# EAGLE board Board Comp 1-10-13 (EAGLE 6.3), part 1 of 2
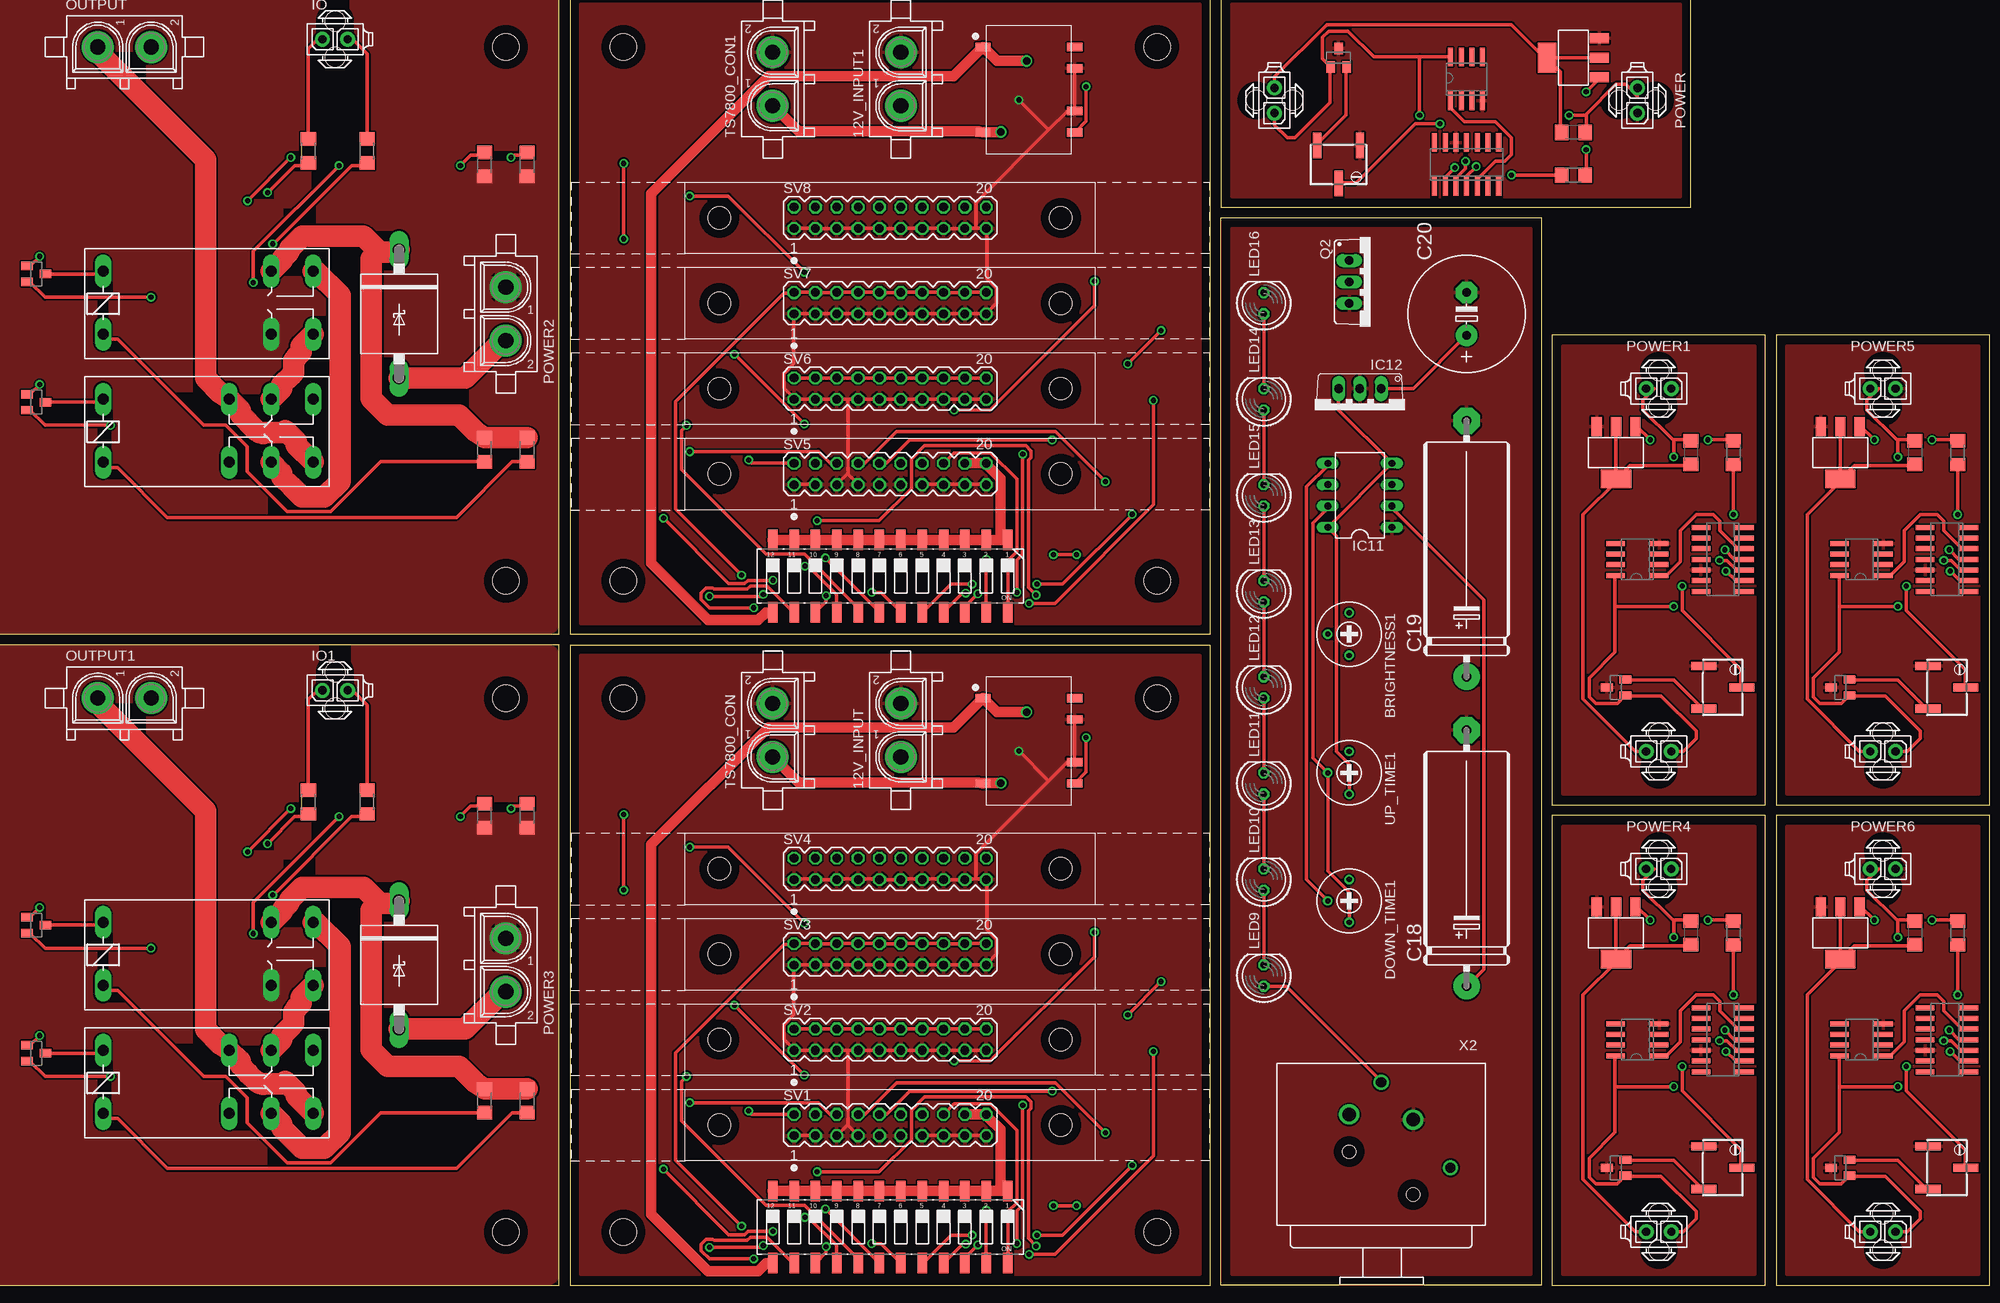
[diagram p0: board, top side]
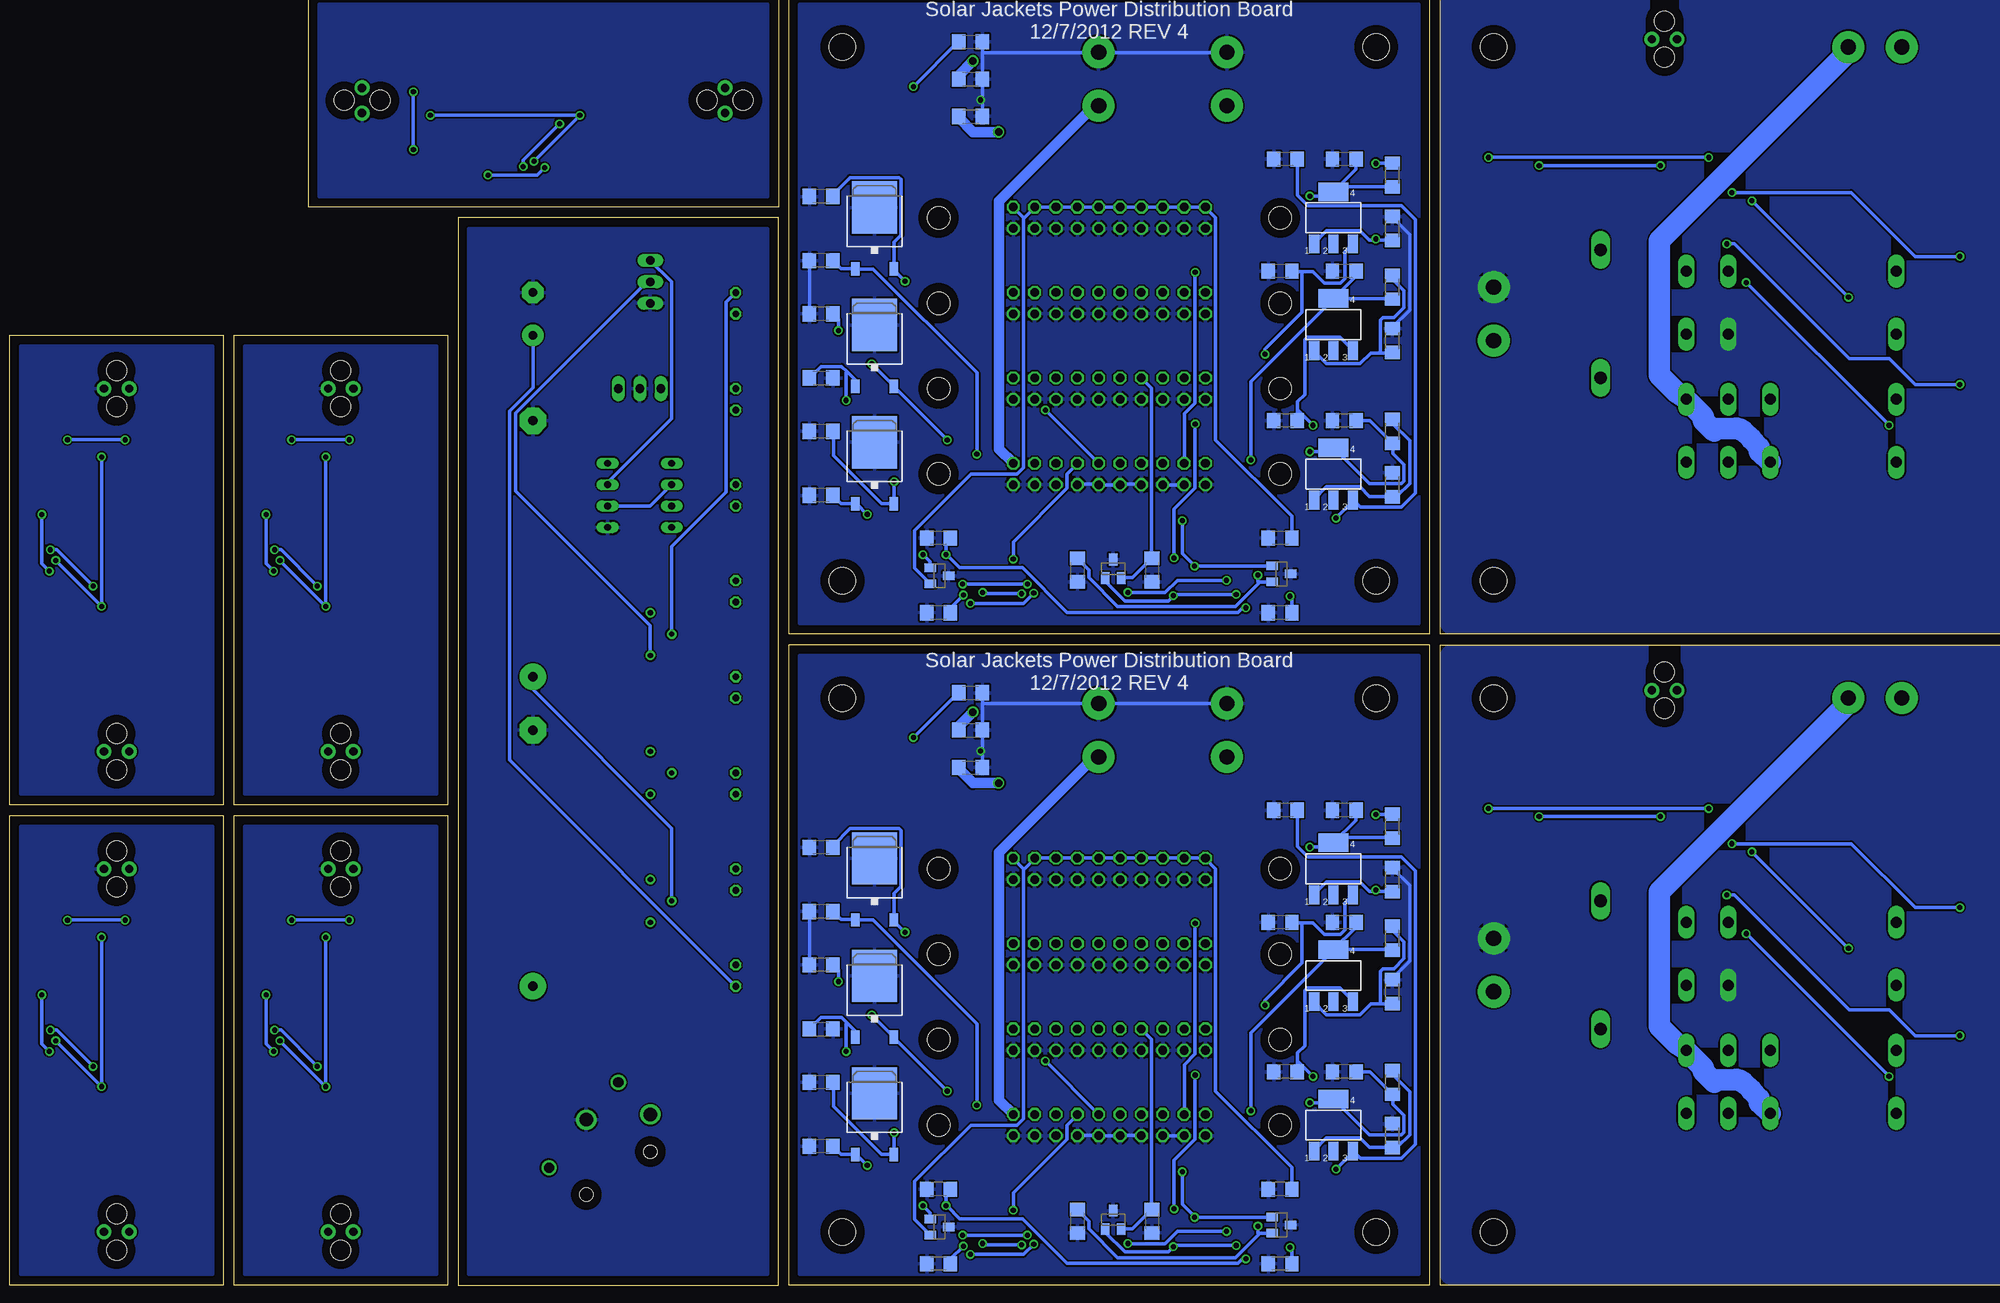
[diagram p1: board, bottom side, seen from below]

No outline drawn. Coordinates in mm, seen from the top.
Copper layers (1*16): Top 0.035mm / dielectric 1.5mm / Bottom 0.035mm
Design rules "default": minimum track width 10mil, minimum drill 24mil, track to track 8mil, track to pad 8mil, pad to pad 8mil, via to via 8mil, smd to smd 8mil, copper to edge 40mil, drill to drill 8mil, minimum pad ring 10mil, minimum via ring 8mil, stop-mask expansion 4mil, vias tented up to drill 0mil, thermal gap 10mil
Net classes: 1 power: width 1.27 mm, drill 0.889 mm
Holes 3.17 mm at 147.32,6.35 83.82,6.35 83.82,69.85 147.32,69.85 147.32,83.82 83.82,83.82 83.82,147.32 147.32,147.32 6.58,84 69.85,147.32 69.85,83.82 6.35,147.32 6.58,6.53 69.85,69.85 69.85,6.35 6.35,69.85
Milling: 40 lines

## Footprints (pad centres in the part's own frame; a part is rotated, then mirrored left to right if it is on the bottom)
SOT23 = smd 1 x 1.4: 1 -0.95,-1.1; 2 0.95,-1.1; 3 0,1.1
350759-4 = drill 1.8 pad 3.81: 1 -3.175,0; 2 3.175,0
C1206 = smd 1.6 x 1.8: 1 -1.4,0; 2 1.4,0
RTRIM3339P = drill 0.61: 1 -2.54,0; 2 0,-2.54; 3 2.54,0
E30-10 = drill 1.118 pad 3.15: + -15.24,0 | drill 1.118 pad 3.15 octagon: - 15.24,0
E5-13 = drill 1.016 pad 2.54: + -2.54,0 | drill 1.016 pad 2.54 octagon: - 2.54,0
P6T15 = drill 1.499 long: A 7.62,0; C -7.62,0
SO14 = smd 0.6 x 2.2: 1 -3.81,-2.6; 2 -2.54,-2.6; 3 -1.27,-2.6; 4 0,-2.6; 5 1.27,-2.6; 6 2.54,-2.6; 7 3.81,-2.6; 8 3.81,2.6; 9 2.54,2.6; 10 1.27,2.6; 11 0,2.6; 12 -1.27,2.6; 13 -2.54,2.6; 14 -3.81,2.6
SOT223 = smd 1.219 x 2.235: 1 -2.311,-3.099; 2 0,-3.099; 3 2.311,-3.099 | smd 3.6 x 2.2: 4 0,3.099
DIL08 = drill 0.813 long: 1 -3.81,-3.81; 2 -1.27,-3.81; 3 1.27,-3.81; 4 3.81,-3.81; 5 3.81,3.81; 6 1.27,3.81; 7 -1.27,3.81; 8 -3.81,3.81
TO220V = drill 1.016 long: 1 -2.54,-2.54; 2 0,-2.54; 3 2.54,-2.54
794681-2 = drill 1 pad 1.778: 1 0,-1.5; 2 0,1.5 | hole 2.4: 2.13,0; -2.17,0
G2R2 = drill 1.321 long: 1 -2.54,-3.683; 2 -2.54,3.81; O1 12.471,3.81; O2 12.471,-3.683; P1 17.45,3.81; P2 17.45,-3.683; S1 22.454,3.81; S2 22.454,-3.683
G2R2A = drill 1.321 long: 1 -2.54,-3.683; 2 -2.54,3.81; P1 17.45,3.81; P2 17.45,-3.683; S1 22.454,3.81; S2 22.454,-3.683
LED5MM = drill 0.813 octagon: A -1.27,0; K 1.27,0
350428-1 = drill 1.8 pad 3.81: 1 -3.175,0; 2 3.175,0
TO252 = smd 1 x 1.6: 1 -2.28,-4.8; 2 2.28,-4.8 | smd 5.4 x 6.2: 3 0,2.5
TO220BV = drill 1.016 long: D 0,-2.54; G -2.54,-2.54; S 2.54,-2.54
RTRIMTS63Y = smd 1 x 3: 1 -2.55,-2.25; 2 0,2.25; 3 2.55,-2.25
R1206 = smd 1.6 x 1.803: 1 -1.422,0; 2 1.422,0
CTS-219-12 = smd 1.13 x 2.44: 1 -13.97,-4.3; 2 -11.43,-4.3; 3 -8.89,-4.3; 4 -6.35,-4.3; 5 -3.81,-4.3; 6 -1.27,-4.3; 7 1.27,-4.3; 8 3.81,-4.3; 9 6.35,-4.3; 10 8.89,-4.3; 11 11.43,-4.3; 12 13.97,-4.3; 13 13.97,4.3; 14 11.43,4.3; 15 8.89,4.3; 16 6.35,4.3; 17 3.81,4.3; 18 1.27,4.3; 19 -1.27,4.3; 20 -3.81,4.3; 21 -6.35,4.3; 22 -8.89,4.3; 23 -11.43,4.3; 24 -13.97,4.3
MA10-2 = drill 1.016 octagon: 1 -11.43,-1.27; 2 -11.43,1.27; 3 -8.89,-1.27; 4 -8.89,1.27; 5 -6.35,-1.27; 6 -6.35,1.27; 7 -3.81,-1.27; 8 -3.81,1.27; 9 -1.27,-1.27; 10 -1.27,1.27; 11 1.27,-1.27; 12 1.27,1.27; 13 3.81,-1.27; 14 3.81,1.27; 15 6.35,-1.27; 16 6.35,1.27; 17 8.89,-1.27; 18 8.89,1.27; 19 11.43,-1.27; 20 11.43,1.27 | hole 2.692: -20.32,0; 20.32,0
SO-08 = smd 0.6 x 2.2: 1 -1.905,-2.6; 2 -0.635,-2.6; 3 0.635,-2.6; 4 1.905,-2.6; 5 1.905,2.6; 6 0.635,2.6; 7 -0.635,2.6; 8 -1.905,2.6
V7805 = smd 0.991 x 1.803: 1 0,0.902; 5 10.16,0.902; 6 10.16,11.798; 7 7.62,11.798; 9 2.54,11.798; 10 0,11.798
NC3FAH2 = drill 1.6: 1 -3.81,0.635; 2 3.81,0 | drill 1.2: 3 0,-3.815; G -8.25,6.355 | hole 1.6: -3.81,9.525; 3.81,4.445

## Placement (x,y rotation side)
3V1  MAX6103  [SOT23]  95.1,84.63 270 bottom
3V2  MAX6103  [SOT23]  115.11,85.24 0 bottom
3V3  MAX6103  [SOT23]  95.1,7.16 270 bottom
3V4  MAX6103  [SOT23]  115.11,7.77 0 bottom
3V5  MAX6103  [SOT23]  135.79,6.93 270 bottom
3V6  MAX6103  [SOT23]  135.79,84.4 270 bottom
12V_INPUT  350759-4  [350759-4]  116.84,66.04 90 top
12V_INPUT1  350759-4  [350759-4]  116.84,143.51 90 top
317CAP1  .33uF  [C1206]  94.61,133.99 180 bottom
317CAP2  1uF  [C1206]  87.63,102.87 180 bottom
317CAP3  .33uF  [C1206]  94.61,56.52 180 bottom
317CAP4  .33uF  [C1206]  95.25,120.65 180 bottom
317CAP5  1uF  [C1206]  87.63,133.99 180 bottom
317CAP6  .33uF  [C1206]  94.61,102.87 180 bottom
317CAP7  1uF  [C1206]  87.63,120.65 180 bottom
317CAP8  1uF  [C1206]  87.63,25.4 180 bottom
317CAP9  .33uF  [C1206]  95.25,43.18 180 bottom
317CAP10  1uF  [C1206]  87.63,56.52 180 bottom
317CAP11  .33uF  [C1206]  94.61,25.4 180 bottom
317CAP12  1uF  [C1206]  87.63,43.18 180 bottom
6103CAP1  1uF  [C1206]  135.89,80.01 180 bottom
6103CAP2  1uF  [C1206]  119.38,85.09 270 bottom
6103CAP3  1uF  [C1206]  95.25,80.01 180 bottom
6103CAP4  1uF  [C1206]  110.49,85.09 270 bottom
6103CAP5  1uF  [C1206]  135.89,88.9 180 bottom
6103CAP6  1uF  [C1206]  95.25,88.9 180 bottom
6103CAP7  1uF  [C1206]  135.89,2.54 180 bottom
6103CAP8  1uF  [C1206]  119.38,7.62 270 bottom
6103CAP9  1uF  [C1206]  95.25,2.54 180 bottom
6103CAP10  1uF  [C1206]  110.49,7.62 270 bottom
6103CAP11  1uF  [C1206]  135.89,11.43 180 bottom
6103CAP12  1uF  [C1206]  95.25,11.43 180 bottom
BRIGHTNESS1  10 k  [RTRIM3339P]  170.18,77.47 270 top
C1  1 uF  [C1206]  196.85,137.16 180 top
C2  1 uF  [C1206]  210.82,99.06 270 top
C3  1uF  [C1206]  149.86,44.45 180 bottom
C4  1uF  [C1206]  149.86,52.07 180 bottom
C5  1uF  [C1206]  149.86,30.48 0 bottom
C6  1uF  [C1206]  149.86,38.1 180 bottom
C7  1uF  [C1206]  149.86,24.13 180 bottom
C8  1uF  [C1206]  149.86,16.51 180 bottom
C9  1uF  [C1206]  149.86,121.92 180 bottom
C10  1uF  [C1206]  149.86,129.54 180 bottom
C11  1uF  [C1206]  149.86,107.95 0 bottom
C12  1uF  [C1206]  149.86,115.57 180 bottom
C13  1uF  [C1206]  149.86,101.6 180 bottom
C14  1uF  [C1206]  149.86,93.98 180 bottom
C15  1 uF  [C1206]  237.49,99.06 270 top
C16  1 uF  [C1206]  237.49,41.91 270 top
C18  1uF  [E30-10]  184.15,50.8 90 top
C19  1uF  [E30-10]  184.15,87.63 90 top
C20  1000uF  [E5-13]  184.15,115.57 90 top
C21  1 uF  [C1206]  210.82,41.91 270 top
D1  6A4  [P6T15]  57.15,38.1 270 top
D3  6A4  [P6T15]  57.15,115.57 270 top
DOWN_TIME1  10k  [RTRIM3339P]  170.18,45.72 270 top
IC1  LM339D  [SO14]  184.15,133.35 0 top
IC2  LM339D  [SO14]  214.63,86.36 90 top
IC3  LM317  [SOT223]  88.9,96.52 0 bottom
IC4  LM317  [SOT223]  88.9,19.05 0 bottom
IC5  LM317  [SOT223]  88.9,49.53 0 bottom
IC6  LM317  [SOT223]  88.9,36.83 0 bottom
IC7  LM317  [SOT223]  88.9,127 0 bottom
IC8  LM317  [SOT223]  88.9,114.3 0 bottom
IC9  LM339D  [SO14]  241.3,86.36 90 top
IC10  LM339D  [SO14]  241.3,29.21 90 top
IC11  ICM7555  [DIL08]  171.45,93.98 90 top
IC12  7805TV  [TO220V]  171.45,104.14 180 top
IC13  LM339D  [SO14]  214.63,29.21 90 top
IO  794681-2  [794681-2]  49.53,148.25 270 top
IO1  794681-2  [794681-2]  49.53,70.78 270 top
J1  794681-2  [794681-2]  207.01,63.5 90 top
J2  794681-2  [794681-2]  161.29,140.97 0 top
J3  794681-2  [794681-2]  207.01,6.35 90 top
J4  794681-2  [794681-2]  233.68,63.5 90 top
J5  794681-2  [794681-2]  233.68,6.35 90 top
K1  G2R2  [G2R2]  24.47,101.6 0 top
K2  G2R2A  [G2R2A]  24.47,116.84 0 top
K3  G2R2  [G2R2]  24.47,24.13 0 top
K4  G2R2A  [G2R2A]  24.47,39.37 0 top
LED9  [LED5MM]  160.02,36.83 90 top
LED10  [LED5MM]  160.02,48.26 90 top
LED11  [LED5MM]  160.02,59.69 90 top
LED12  [LED5MM]  160.02,71.12 90 top
LED13  [LED5MM]  160.02,82.55 90 top
LED14  [LED5MM]  160.02,105.41 90 top
LED15  [LED5MM]  160.02,93.98 90 top
LED16  [LED5MM]  160.02,116.84 90 top
OUTPUT  350428-1  [350428-1]  24.47,147.32 0 top
OUTPUT1  350428-1  [350428-1]  24.47,69.85 0 top
POWER  794681-2  [794681-2]  204.47,140.97 0 top
POWER1  794681-2  [794681-2]  207.01,106.68 90 top
POWER2  350428-1  [350428-1]  69.85,115.57 270 top
POWER3  350428-1  [350428-1]  69.85,38.1 270 top
POWER4  794681-2  [794681-2]  207.01,49.53 90 top
POWER5  794681-2  [794681-2]  233.68,106.68 90 top
POWER6  794681-2  [794681-2]  233.68,49.53 90 top
PWR_1  7805DT  [TO252]  143.51,48.26 0 bottom
PWR_2  7805DT  [TO252]  143.51,34.29 0 bottom
PWR_3  7805DT  [TO252]  143.51,20.32 0 bottom
PWR_4  7805DT  [TO252]  143.51,125.73 0 bottom
PWR_5  7805DT  [TO252]  143.51,111.76 0 bottom
PWR_6  7805DT  [TO252]  143.51,97.79 0 bottom
Q2  IRF512  [TO220BV]  172.72,119.38 270 top
R1  10k  [RTRIMTS63Y]  168.91,133.35 180 top
R2  10k  [RTRIMTS63Y]  214.63,71.12 270 top
R3  220  [R1206]  81.92,101.6 90 bottom
R4  361  [R1206]  81.92,95.25 90 bottom
R5  220  [R1206]  81.92,132.08 90 bottom
R6  361  [R1206]  81.92,125.73 90 bottom
R7  220  [R1206]  81.92,24.13 90 bottom
R8  361  [R1206]  81.92,17.78 90 bottom
R9  220  [R1206]  81.92,54.61 90 bottom
R10  361  [R1206]  81.92,48.26 90 bottom
R11  220  [R1206]  81.92,41.27 90 bottom
R12  361  [R1206]  81.92,34.92 90 bottom
R13  220  [R1206]  81.92,118.75 90 bottom
R14  361  [R1206]  81.92,112.39 90 bottom
R15  1k  [R1206]  72.39,99.4 90 top
R16  1k  [R1206]  67.31,99.4 90 top
R17  1k  [R1206]  53.34,134.96 90 top
R18  1k  [R1206]  46.35,134.96 90 top
R19  0  [R1206]  67.31,133.35 90 top
R20  0  [R1206]  72.39,133.35 90 top
R21  1k  [R1206]  72.39,21.93 90 top
R22  1k  [R1206]  67.31,21.93 90 top
R23  1k  [R1206]  53.34,57.49 90 top
R24  1k  [R1206]  46.35,57.49 90 top
R25  0  [R1206]  67.31,55.88 90 top
R26  0  [R1206]  72.39,55.88 90 top
R27  10k  [RTRIMTS63Y]  214.63,13.97 270 top
R28  10k  [RTRIMTS63Y]  241.3,71.12 270 top
R29  10k  [RTRIMTS63Y]  241.3,13.97 270 top
S1  219-12  [CTS-219-12]  115.57,6.91 180 top
S2  219-12  [CTS-219-12]  115.57,84.38 180 top
SV1  AMPLATCH-20  [MA10-2]  115.57,19.05 0 top
SV2  AMPLATCH-20  [MA10-2]  115.57,29.21 0 top
SV3  AMPLATCH-20  [MA10-2]  115.57,39.37 0 top
SV4  AMPLATCH-20  [MA10-2]  115.57,49.53 0 top
SV5  AMPLATCH-20  [MA10-2]  115.57,96.52 0 top
SV6  AMPLATCH-20  [MA10-2]  115.57,106.68 0 top
SV7  AMPLATCH-20  [MA10-2]  115.57,116.84 0 top
SV8  AMPLATCH-20  [MA10-2]  115.57,127 0 top
T1  PMV56XN  [SOT23]  13.97,105.07 270 top
T2  PMV56XN  [SOT23]  13.97,120.31 270 top
T3  PMV56XN  [SOT23]  13.97,27.6 270 top
T4  PMV56XN  [SOT23]  13.97,42.84 270 top
TS7800_CON  350759-4  [350759-4]  101.6,66.04 90 top
TS7800_CON1  350759-4  [350759-4]  101.6,143.51 90 top
U$1  100  [R1206]  196.85,132.08 0 top
U$2  MAX6103  [SOT23]  168.91,146.05 0 top
U$3  NDT3055  [SOT223]  196.85,146.05 90 top
U$4  LM35  [SO-08]  184.15,143.51 0 top
U$5  100  [R1206]  215.9,99.06 90 top
U$6  MAX6103  [SOT23]  201.93,71.12 90 top
U$7  NDT3055  [SOT223]  201.93,99.06 180 top
U$8  LM35  [SO-08]  204.47,86.36 90 top
U$9  V7805  [V7805]  125.73,69.85 270 top
U$10  V7805  [V7805]  125.73,147.32 270 top
U$11  100  [R1206]  215.9,41.91 90 top
U$12  MAX6103  [SOT23]  201.93,13.97 90 top
U$13  NDT3055  [SOT223]  201.93,41.91 180 top
U$14  LM35  [SO-08]  204.47,29.21 90 top
U$15  100  [R1206]  242.57,99.06 90 top
U$16  MAX6103  [SOT23]  228.6,71.12 90 top
U$17  NDT3055  [SOT223]  228.6,99.06 180 top
U$18  LM35  [SO-08]  231.14,86.36 90 top
U$19  100  [R1206]  242.57,41.91 90 top
U$20  MAX6103  [SOT23]  228.6,13.97 90 top
U$21  NDT3055  [SOT223]  228.6,41.91 180 top
U$22  LM35  [SO-08]  231.14,29.21 90 top
UP_TIME1  10k  [RTRIM3339P]  170.18,60.96 270 top
V7805_C1  1uF  [C1206]  132.08,147.96 0 bottom
V7805_C2  1uF  [C1206]  132.08,143.51 0 bottom
V7805_C3  1uF  [C1206]  132.08,139.06 0 bottom
V7805_C4  1uF  [C1206]  132.08,70.48 0 bottom
V7805_C5  1uF  [C1206]  132.08,66.04 0 bottom
V7805_C6  1uF  [C1206]  132.08,61.59 0 bottom
X2  NC3FAH2  [NC3FAH2]  173.99,20.32 180 top

## Library data of the parts
3V1-3V6 U$1 U$2 U$4-U$6 U$8 U$11 U$12 U$14-U$16 U$18-U$20 U$22 = SolarJacketsADC
12V_INPUT 12V_INPUT1 J1-J5 POWER POWER1 POWER4-POWER6 = con-amp
317CAP1-317CAP12 6103CAP1-6103CAP12 C1-C16 C18-C21 R3-R14 V7805_C1-V7805_C6 = rcl
BRIGHTNESS1 DOWN_TIME1 R1 R2 R27-R29 UP_TIME1 = resistor
D1 D3 = diode
IC1-IC10 IC12 IC13 PWR_1-PWR_6 = linear
IC11 = maxim; MF: MAXIM; MPN: ICM7555IPA+; OC_FARNELL: 9663762; OC_NEWARK: 68K4387
IO IO1 = con-amp; DIR: DIR; ON: ON
K1 K3 = relay; MF: OMRON COMPONENTS USA; MPN: G2R-2-DC6; OC_FARNELL: unknown; OC_NEWARK: 89C5317
K2 K4 = relay; MPN: G2R-2A-DC24; OC_FARNELL: 6985269; OC_NEWARK: 36M5257
LED9-LED16 = led
OUTPUT OUTPUT1 TS7800_CON TS7800_CON1 = con-amp; NEG: -; POS: +
POWER2 POWER3 = con-amp; NEG: -; POS: +; VOLTAGE: 12V
Q2 = transistor-power
R15-R18 R21-R24 = SolarJacketsADC; PART_NUM: CR1206-FX-1001GLF
R19 R20 R25 R26 = SolarJacketsADC; PART_NUM: CR1206-J/-000ELF
S1 S2 = switch-dil; OC_FARNELL: unknown; OC_NEWARK: unknown
SV1-SV8 = SolarJacketsADC; PART_NUM: 5499160-1
T1-T4 = SolarJacketsADC; PART_NUM: PMV56XN,215
U$3 U$7 U$13 U$17 U$21 = SolarJacketsADC; PART_NUM: NDT3055
U$9 U$10 = V7805
X2 = con-neutrik_ag; MPN: NC3FAH2; OC_FARNELL: unknown; OC_NEWARK: 27B4208

## Nets
3.3V1: 317CAP8.1 IC4.4 R7.1 SV1.6
3.3V1_EN: 317CAP3.1 IC4.3 S1.19
3.3V1_EN1: 317CAP1.1 IC3.3 S2.19
3.3V2: 317CAP10.1 IC5.4 R9.1 SV1.4
3.3V2_EN: 317CAP9.1 IC5.3 S1.18
3.3V2_EN1: 317CAP4.1 IC7.3 S2.18
3.3V3: 317CAP12.1 IC6.4 R11.1 SV1.2
3.3V3_EN: 317CAP11.1 IC6.3 S1.17
3.3V3_EN1: 317CAP6.1 IC8.3 S2.17
3.3V4: 317CAP7.1 IC8.4 R13.1 SV5.2
3.3V5: 317CAP2.1 IC3.4 R3.1 SV5.6
3.3V6: 317CAP5.1 IC7.4 R5.1 SV5.4
5V1: C4.1 PWR_1.2 SV1.12
5V1_EN: C3.1 PWR_1.1 S1.22
5V1_EN1: C9.1 PWR_4.1 S2.22
5V2: C6.1 PWR_2.2 SV1.10
5V2_EN: C5.1 PWR_2.1 S1.21
5V2_EN1: C11.1 PWR_5.1 S2.21
5V3: C7.1 PWR_3.2 SV1.8
5V3_EN: C8.1 PWR_3.1 S1.20
5V3_EN1: C14.1 PWR_6.1 S2.20
5V4: C13.1 PWR_6.2 SV5.8
5V5: C12.1 PWR_5.2 SV5.10
5V6: C10.1 PWR_4.2 SV5.12
5V7: IC11.4 IC11.8 IC12.3 UP_TIME1.3
12V: C1.1 IC1.3 J2.1 POWER.2 U$2.1 U$4.8
12V1: C2.1 IC2.3 J1.1 POWER1.2 U$6.1 U$8.8
12V1_EN: S1.24 SV1.16
12V1_EN1: S2.24 SV5.16
12V2 [power]: 12V_INPUT.1 S1.1 S1.2 S1.3 S1.4 S1.5 S1.6 S1.7 S1.8 S1.9 S1.10 S1.11 S1.12 SV1.18 SV1.20
12V2_EN: S1.23 SV1.14
12V2_EN1: S2.23 SV5.14
12V3 [power]: 12V_INPUT1.1 S2.1 S2.2 S2.3 S2.4 S2.5 S2.6 S2.7 S2.8 S2.9 S2.10 S2.11 S2.12 SV5.18 SV5.20
12V4 [power]: D3.C K2.P1 R15.2 R16.2
12V5 [power]: D1.C K4.P1 R21.2 R22.2
12V6: C21.1 IC13.3 J3.1 POWER4.2 U$12.1 U$14.8
12V7: C15.1 IC9.3 J4.1 POWER5.2 U$16.1 U$18.8
12V8: C16.1 IC10.3 J5.1 POWER6.2 U$20.1 U$22.8
12V_PRE [power]: D3.A POWER2.2
12V_PRE1 [power]: D1.A POWER3.2
24V1: C20.+ IC12.1 LED9.A X2.3
DIR: IO.2 R17.2
DIR1: IO1.2 R23.2
GND: IC1.12 POWER.1 R1.1 U$2.3 U$3.3 U$4.4
GND1: IC2.12 POWER1.1 R2.1 U$6.3 U$7.3 U$8.4
GND2: 3V3.3 3V4.3 3V5.3 12V_INPUT.2 317CAP3.2 317CAP8.2 317CAP9.2 317CAP10.2 317CAP11.2 317CAP12.2 6103CAP7.2 6103CAP8.2 6103CAP9.2 6103CAP10.2 6103CAP11.2 6103CAP12.2 C3.2 C4.2 C5.2 C6.2 C7.2 C8.2 PWR_1.3 PWR_2.3 PWR_3.3 R8.2 R10.2 R12.2 SV1.1 SV1.3 SV1.5 SV1.7 SV1.9 SV1.11 SV1.13 SV1.15 SV1.17 SV1.19 SV2.1 SV2.3 SV2.5 SV2.7 SV2.9 SV2.11 SV2.13 SV2.15 SV2.17 SV2.19 SV3.1 SV3.3 SV3.5 SV3.7 SV3.9 SV3.11 SV3.13 SV3.15 SV3.17 SV3.19 SV4.1 SV4.3 SV4.5 SV4.7 SV4.9 SV4.11 SV4.13 SV4.15 SV4.17 SV4.19 TS7800_CON.2 U$9.7 U$9.9 V7805_C4.2 V7805_C5.2 V7805_C6.2
GND3: 3V1.3 3V2.3 3V6.3 12V_INPUT1.2 317CAP1.2 317CAP2.2 317CAP4.2 317CAP5.2 317CAP6.2 317CAP7.2 6103CAP1.2 6103CAP2.2 6103CAP3.2 6103CAP4.2 6103CAP5.2 6103CAP6.2 C9.2 C10.2 C11.2 C12.2 C13.2 C14.2 PWR_4.3 PWR_5.3 PWR_6.3 R4.2 R6.2 R14.2 SV5.1 SV5.3 SV5.5 SV5.7 SV5.9 SV5.11 SV5.13 SV5.15 SV5.17 SV5.19 SV6.1 SV6.3 SV6.5 SV6.7 SV6.9 SV6.11 SV6.13 SV6.15 SV6.17 SV6.19 SV7.1 SV7.3 SV7.5 SV7.7 SV7.9 SV7.11 SV7.13 SV7.15 SV7.17 SV7.19 SV8.1 SV8.3 SV8.5 SV8.7 SV8.9 SV8.11 SV8.13 SV8.15 SV8.17 SV8.19 TS7800_CON1.2 U$10.7 U$10.9 V7805_C1.2 V7805_C2.2 V7805_C3.2
GND4: IC9.12 POWER5.1 R28.1 U$16.3 U$17.3 U$18.4
GND5: C18.- C19.- C20.- IC11.1 IC12.2 Q2.S X2.1
GND6 [power]: K2.P2 POWER2.1 R19.1 R20.1
GND7 [power]: K4.P2 POWER3.1 R25.1 R26.1
GND8: IC13.12 POWER4.1 R27.1 U$12.3 U$13.3 U$14.4
GND9: IC10.12 POWER6.1 R29.1 U$20.3 U$21.3 U$22.4
MOTOR+ [power]: K1.O2 K1.S1 OUTPUT.2
MOTOR+1 [power]: K3.O2 K3.S1 OUTPUT1.2
MOTOR- [power]: K1.O1 K1.S2 OUTPUT.1
MOTOR-1 [power]: K3.O1 K3.S2 OUTPUT1.1
N$1: IC1.2 U$1.1
N$2: U$1.2 U$3.1
N$3: IC1.4 R1.2
N$4: R1.3 U$2.2
N$5: C1.2 J2.2 U$3.2 U$3.4
N$6: IC2.2 U$5.1
N$7: IC2.4 R2.2
N$8: IC1.5 U$4.1
N$9: R2.3 U$6.2
N$10: U$5.2 U$7.1
N$11: C2.2 J1.2 U$7.2 U$7.4
N$12: IC2.5 U$8.1
N$13: IC4.1 R7.2 R8.1
N$14: IC5.1 R9.2 R10.1
N$15: IC6.1 R11.2 R12.1
N$16: U$9.6 V7805_C4.1
N$17: IC3.1 R3.2 R4.1
N$18: IC7.1 R5.2 R6.1
N$19: IC8.1 R13.2 R14.1
N$20: U$10.6 V7805_C1.1
N$21: IC9.2 U$15.1
N$22: IC9.4 R28.2
N$23: R28.3 U$16.2
N$24: U$15.2 U$17.1
N$25: C15.2 J4.2 U$17.2 U$17.4
N$26: IC9.5 U$18.1
N$27: IC10.2 U$19.1
N$28: IC10.4 R29.2
N$29: R29.3 U$20.2
N$30: U$19.2 U$21.1
N$31: C16.2 J5.2 U$21.2 U$21.4
N$32: IC10.5 U$22.1
N$34: C18.+ IC11.2 IC11.6
N$35: C19.+ DOWN_TIME1.2 IC11.5
N$36: DOWN_TIME1.3 IC11.7 UP_TIME1.2
N$37: LED9.K LED10.A
N$38: LED10.K LED11.A
N$39: LED11.K LED12.A
N$40: LED12.K LED13.A
N$41: LED13.K LED15.A
N$42: LED14.A LED15.K
N$43: LED14.K LED16.A
N$44: BRIGHTNESS1.2 LED16.K
N$45: BRIGHTNESS1.3 Q2.D
N$46: IC11.3 Q2.G
N$47 [power]: K1.P2 K2.S1
N$48 [power]: K1.P1 K2.S2
N$49: K1.1 R15.1
N$50: K2.1 R16.1
N$51: K1.2 T1.3
N$52: K2.2 T2.3
N$53: R18.1 T2.1
N$54: R17.1 T1.1
N$55: R19.2 T1.2
N$56: R20.2 T2.2
N$57 [power]: K3.P2 K4.S1
N$58 [power]: K3.P1 K4.S2
N$59: K3.1 R21.1
N$60: K4.1 R22.1
N$61: K3.2 T3.3
N$62: K4.2 T4.3
N$63: R24.1 T4.1
N$64: R23.1 T3.1
N$65: R25.2 T3.2
N$66: R26.2 T4.2
N$67: IC13.2 U$11.1
N$68: IC13.4 R27.2
N$69: R27.3 U$12.2
N$70: U$11.2 U$13.1
N$71: C21.2 J3.2 U$13.2 U$13.4
N$72: IC13.5 U$14.1
ON: IO.1 R18.2
ON1: IO1.1 R24.2
TS7800_+ [power]: TS7800_CON.1 U$9.5 V7805_C6.1
TS7800_+1 [power]: TS7800_CON1.1 U$10.5 V7805_C3.1
TS7800_EN [power]: S1.13 U$9.1 V7805_C5.1
TS7800_EN1 [power]: S2.13 U$10.1 V7805_C2.1
VREF1: 3V3.2 6103CAP8.1 SV3.2 SV3.4 SV3.6 SV3.8 SV3.10 SV3.12 SV3.14 SV3.16 SV3.18 SV3.20
VREF1_EN: 3V3.1 6103CAP7.1 S1.16
VREF1_EN1: 3V1.1 6103CAP1.1 S2.16
VREF2: 3V4.2 6103CAP10.1 SV2.2 SV2.4 SV2.6 SV2.8 SV2.10 SV2.12 SV2.14 SV2.16 SV2.18 SV2.20
VREF2_EN: 3V4.1 6103CAP9.1 S1.15
VREF2_EN1: 3V2.1 6103CAP3.1 S2.15
VREF3: 3V5.2 6103CAP12.1 SV4.2 SV4.4 SV4.6 SV4.8 SV4.10 SV4.12 SV4.14 SV4.16 SV4.18 SV4.20
VREF3_EN: 3V5.1 6103CAP11.1 S1.14
VREF3_EN1: 3V6.1 6103CAP5.1 S2.14
VREF4: 3V1.2 6103CAP2.1 SV7.2 SV7.4 SV7.6 SV7.8 SV7.10 SV7.12 SV7.14 SV7.16 SV7.18 SV7.20
VREF5: 3V2.2 6103CAP4.1 SV6.2 SV6.4 SV6.6 SV6.8 SV6.10 SV6.12 SV6.14 SV6.16 SV6.18 SV6.20
VREF6: 3V6.2 6103CAP6.1 SV8.2 SV8.4 SV8.6 SV8.8 SV8.10 SV8.12 SV8.14 SV8.16 SV8.18 SV8.20